# EAGLE board attiny85 (EAGLE 9.6.2)
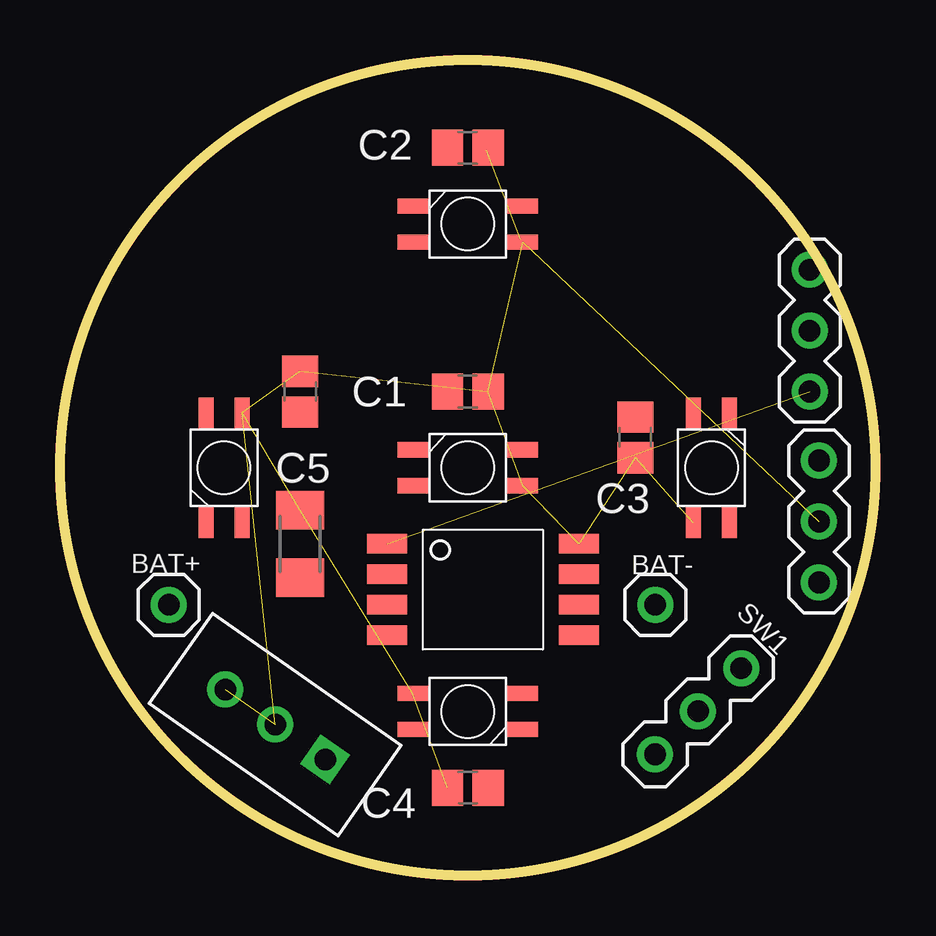
[diagram p0: board, top side]
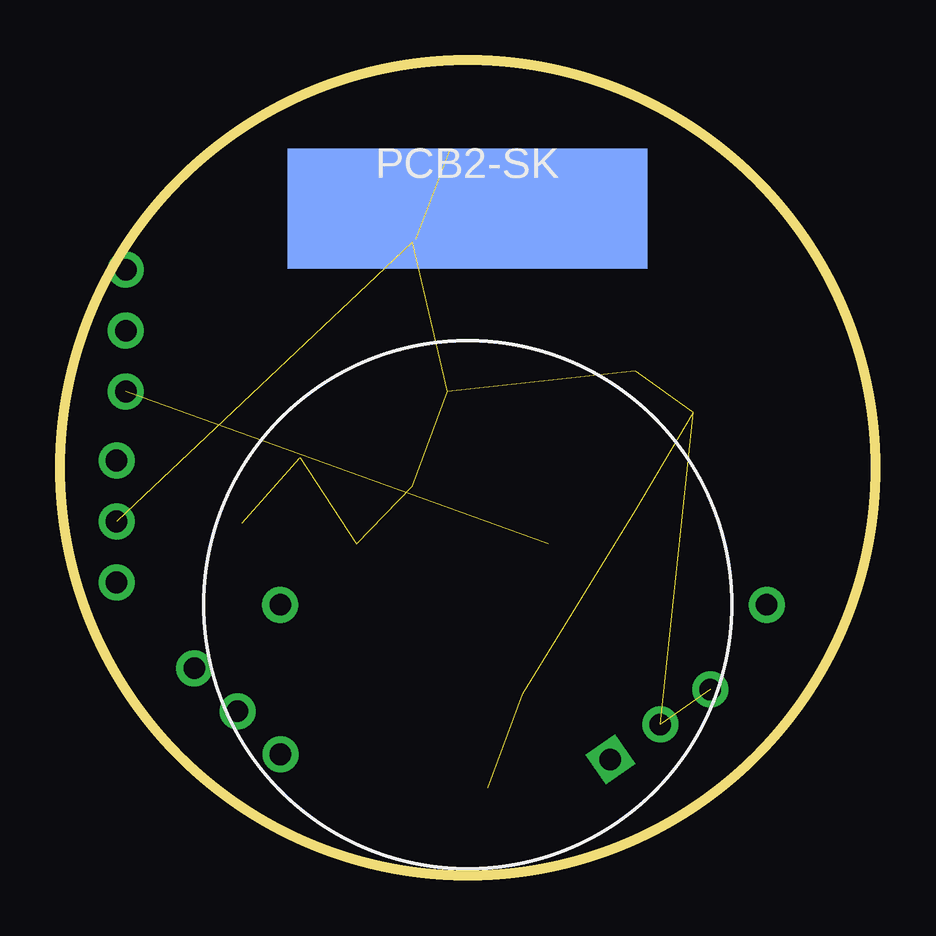
[diagram p1: board, bottom side, seen from below]

Size 34 x 34 mm. Coordinates in mm from the lower left corner, seen from the top.
Outline: circle at 17,17 radius 17
Copper layers (1*16): Top 0.035mm / dielectric 1.5mm / Bottom 0.035mm
Design rules "default": minimum track width 6mil, minimum drill 0.35mm, track to track 6mil, track to pad 6mil, pad to pad 6mil, via to via 6mil, smd to smd 6mil, copper to edge 40mil, drill to drill 6mil, minimum pad ring 10mil, minimum via ring 8mil, stop-mask expansion 4mil, vias tented up to drill 0mil, thermal gap 10mil

## Footprints (pad centres in the part's own frame; a part is rotated, then mirrored left to right if it is on the bottom)
ATTINY85-20SUR = smd 1.676 x 0.813: P1 -4,1.905; P2 -4,0.635; P3 -4,-0.635; P4 -4,-1.905; P5 4,-1.905; P6 4,-0.635; P7 4,0.635; P8 4,1.905
PINHEAD-MA01-1 = drill 0.9 pad 1.5: 1 1.27,0
C2012 = smd 1.3 x 1.5: 1 -0.85,0; 2 0.85,0
PAD5X15 = smd 15 x 5: P$1 0,0
M3216 = smd 1.6 x 2: 1 -1.4,0; 2 1.4,0
SK6812MINI-E = smd 1.27 x 0.635: DIN 2.3,0.75; DOUT -2.3,-0.75; GND 2.3,-0.75; VDD -2.3,0.75
PINHEAD-MA03-1 = drill 0.9 pad 1.5: 1 -1.27,0; 2 1.27,0; 3 3.81,0
SW3-1 = drill 0.9 pad 1.5 square: 1 -1.27,0 | drill 0.9 pad 1.5: 2 1.27,0; 3 3.81,0

## Placement (x,y rotation side)
ATTINY85-1  ATTINY85  [ATTINY85-20SUR]  17.63,11.92 0 top
BAT+  bat+  [PINHEAD-MA01-1]  3.27,11.29 0 top
BAT-  bat-  [PINHEAD-MA01-1]  23.55,11.29 0 top
C1  [C2012]  17,20.18 180 top
C2  [C2012]  17,30.34 180 top
C3  [C2012]  23.98,18.27 90 top
C4  [C2012]  17,3.67 0 top
C5  [C2012]  10.01,20.18 270 top
PAD33  PAD150X50  [PAD5X15]  17,27.79 0 bottom
R1  10K  [M3216]  10.01,13.82 90 top
SK1  SK6812MINI-E  [SK6812MINI-E]  17,17 180 top
SK2  SK6812MINI-E  [SK6812MINI-E]  17,27.16 180 top
SK3  SK6812MINI-E  [SK6812MINI-E]  27.16,17 90 top
SK4  SK6812MINI-E  [SK6812MINI-E]  17,6.84 0 top
SK5  SK6812MINI-E  [SK6812MINI-E]  6.84,17 270 top
SV1  PIN-A  [PINHEAD-MA03-1]  31.25,21.45 90 top
SV2  PIN-B  [PINHEAD-MA03-1]  31.64,16.03 270 top
SW1  bat+  [PINHEAD-MA03-1]  27.5,7.74 225 top
SW2  POWER  [SW3-1]  10.01,5.57 145 top

## Library data of the parts
ATTINY85-1 BAT+ BAT- PAD33 SK1-SK5 = ytani1
C1-C5 = rcl; SPICEPREFIX: C
R1 = rcl; SPICEPREFIX: R
SV1 SV2 SW1 = ytani1; OC_FARNELL: unknown; OC_NEWARK: unknown
SW2 = ytani1; MF: HiLetgo; URL_AMAZON: https://www.amazon.co.jp/gp/product/B01LYVYQNO/

## Nets
+3V3: BAT+.1 SW2.1
BAT+: ATTINY85-1.P8 C1.1 C2.1 C3.1 C4.1 C5.1 R1.2 SK1.VDD SK2.VDD SK3.VDD SK4.VDD SK5.VDD SV2.2 SW2.2 SW2.3
GND: ATTINY85-1.P4 BAT-.1 C1.2 C2.2 C3.2 C4.2 C5.2 SK1.GND SK2.GND SK3.GND SK4.GND SK5.GND SV2.3 SW1.1 SW1.2
N$1: ATTINY85-1.P3 SK1.DIN
N$2: ATTINY85-1.P7 SV2.1
N$3: ATTINY85-1.P6 SV1.3
N$4: ATTINY85-1.P1 SV1.1
N$5: ATTINY85-1.P5 SV1.2
N$6: SK1.DOUT SK2.DIN
N$7: SK2.DOUT SK3.DIN
N$8: SK3.DOUT SK4.DIN
N$9: SK4.DOUT SK5.DIN
PB3: ATTINY85-1.P2 R1.1 SW1.3

## Tracks (layer width: path | path; a pad name or v marks a point on that pad's centre or on a via)
BAT+  (14 unrouted)
  Top 0.254: 17.75,30.23 C2.1 | SK2.VDD 19.18,26.52
  Top 0.305: 17.63,30.55 C2.1
N$4  (1 unrouted)
N$8
  Top 0.254: 19.43,7.59 SK4.DIN
PB3
  Top 0.305: 10.01,12.55 R1.1

## Text on the board
bPlace: PCB2-SK